# EAGLE board ChargeStepUpBoard (EAGLE 8.5.2)
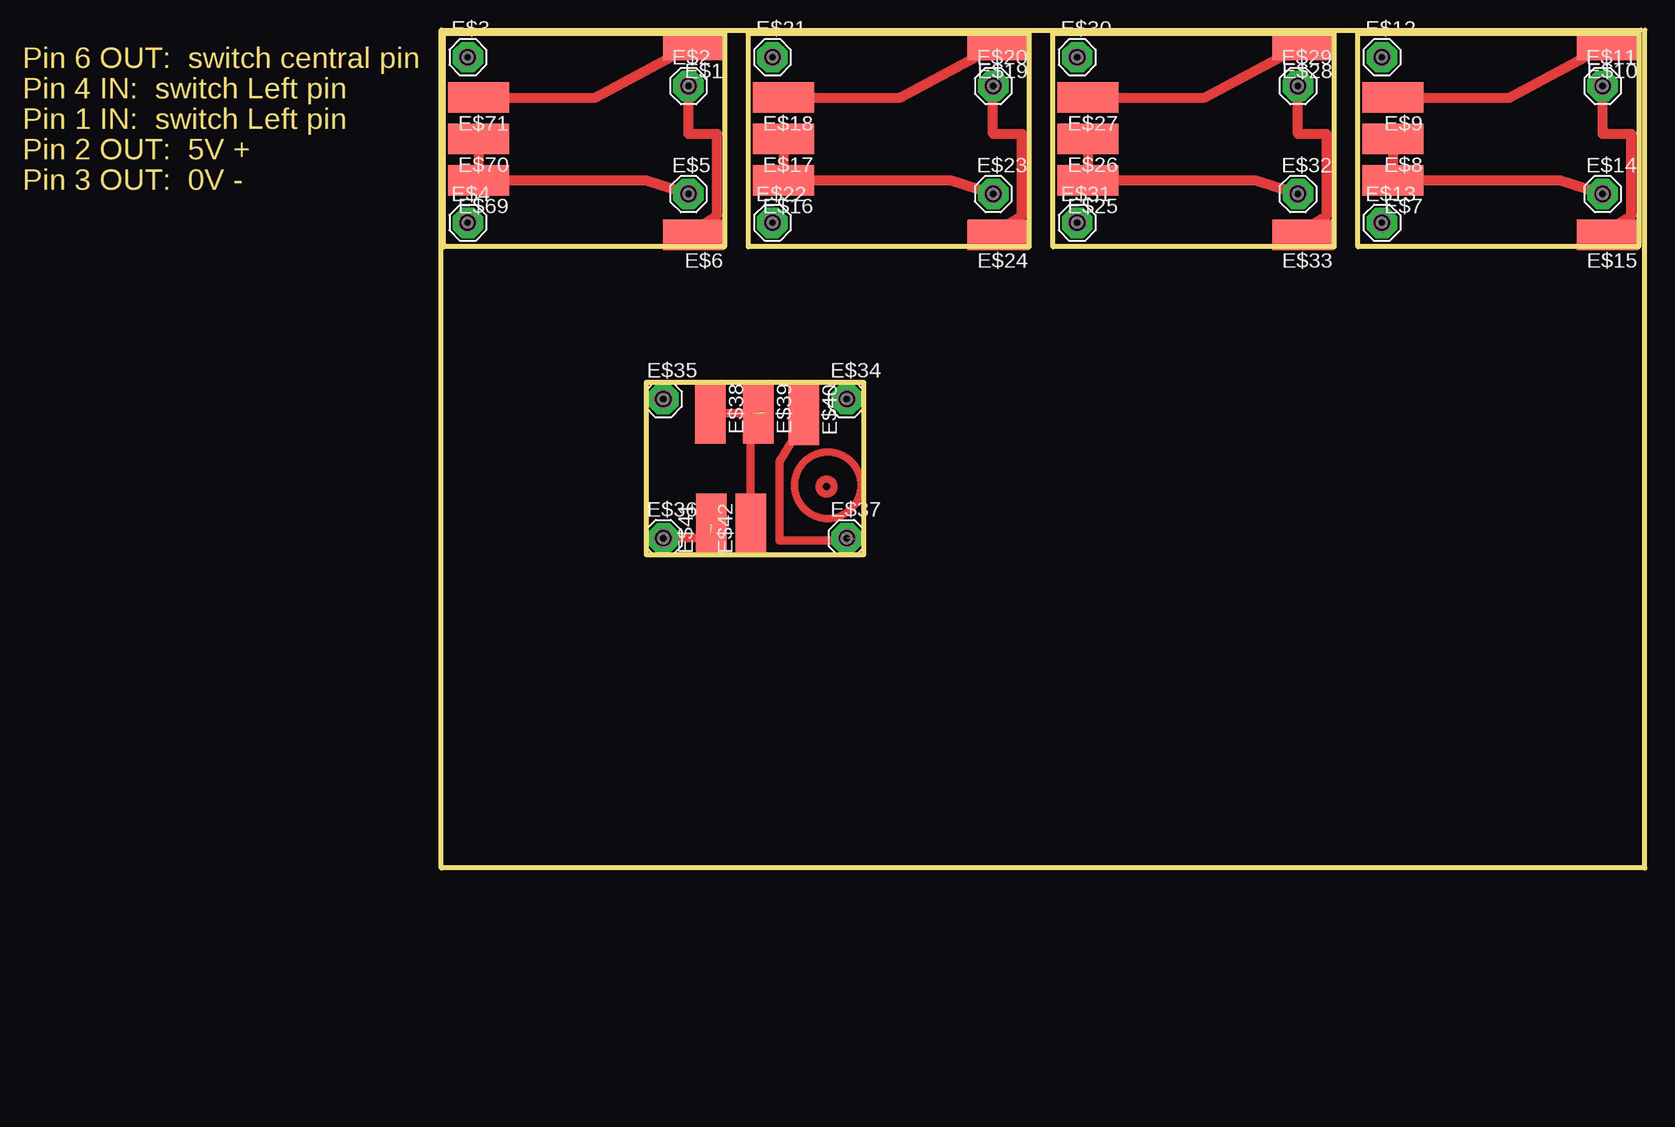
[diagram p0: board, top side]
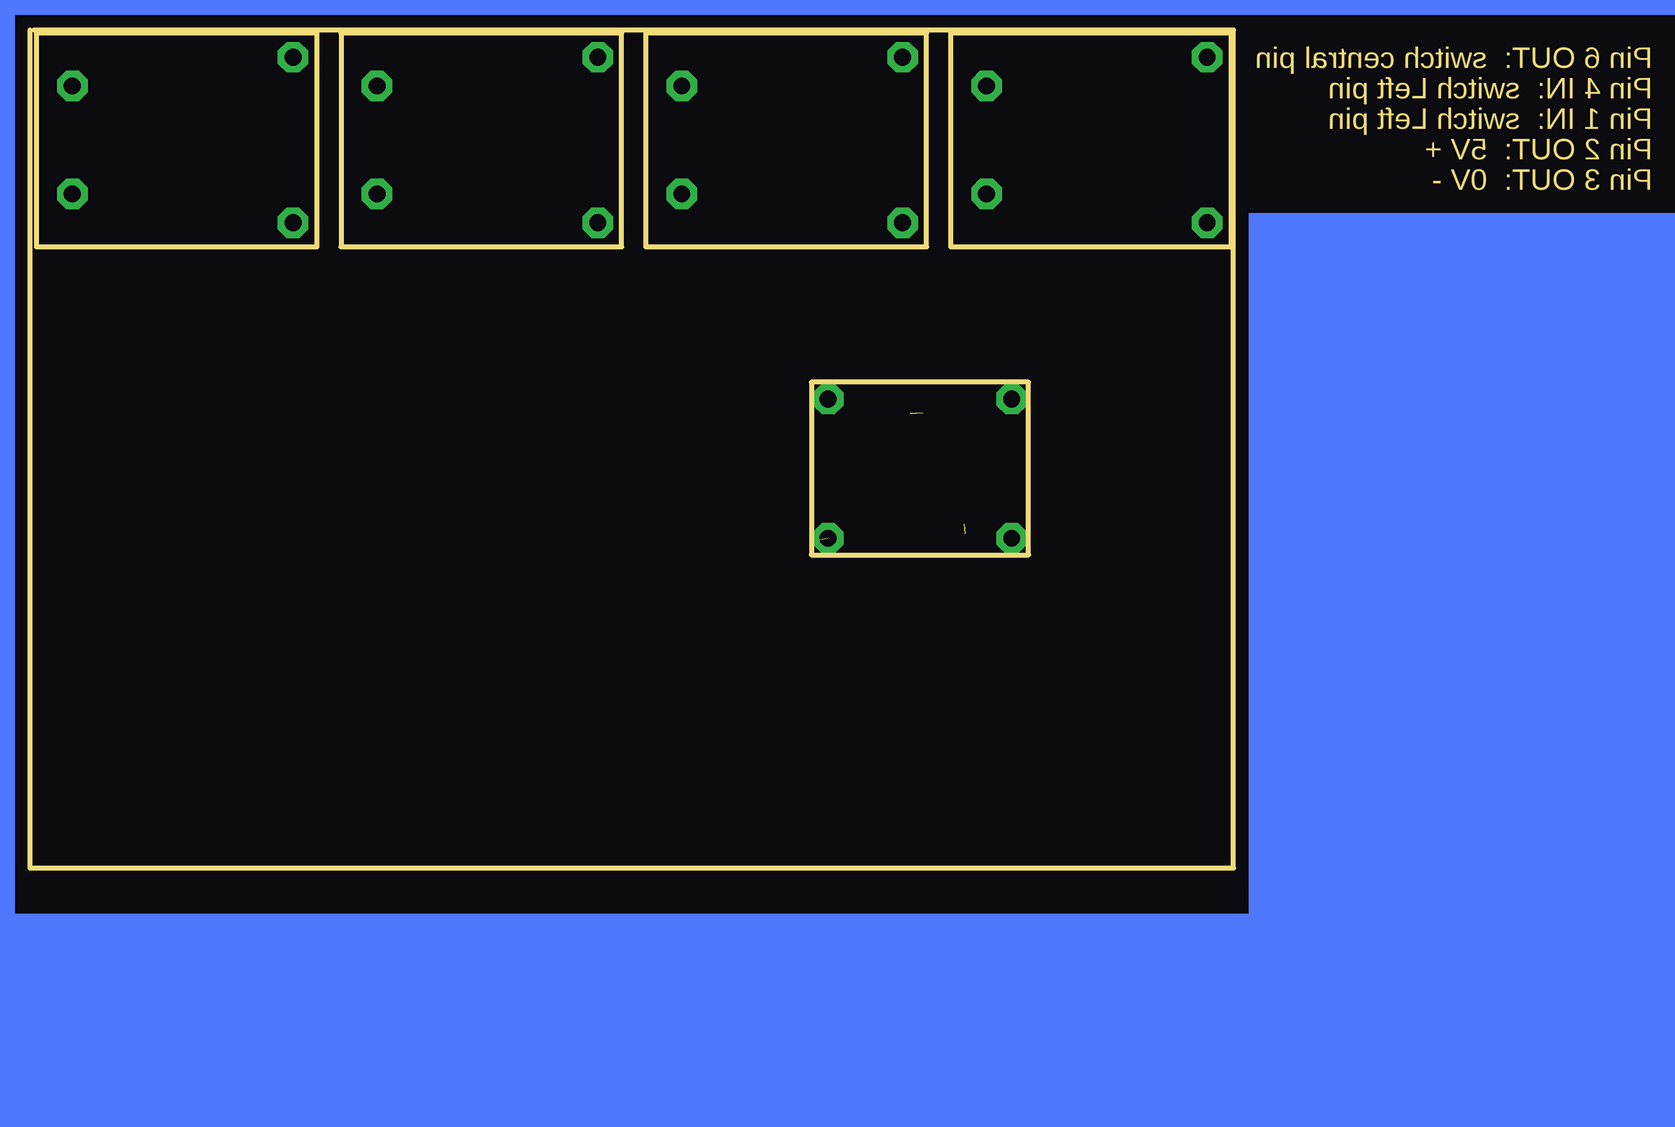
[diagram p1: board, bottom side, seen from below]

Size 100.33 x 69.85 mm. Coordinates in mm from the lower left corner, seen from the top.
Outline: 100,69.85 0,69.85 0,0 100.33,0 100.33,69.85
Outline: 23.6,51.8 0.2,51.8 0.2,69.6 23.6,69.6 23.6,51.8
Outline: 99.8,51.8 76.4,51.8 76.4,69.6 99.8,69.6 99.8,51.8
Outline: 49,51.8 25.6,51.8 25.6,69.6 49,69.6 49,51.8
Outline: 74.4,51.8 51,51.8 51,69.6 74.4,69.6 74.4,51.8
Outline: 17.1,40.5 35.2,40.5 35.2,26.1 17.1,26.1 17.1,40.5
Copper layers (1*16): Top 0.035mm / dielectric 1.5mm / Bottom 0.035mm
Design rules "default": minimum track width 6mil, minimum drill 0.35mm, track to track 6mil, track to pad 6mil, pad to pad 6mil, via to via 6mil, smd to smd 6mil, copper to edge 40mil, drill to drill 6mil, minimum pad ring 10mil, minimum via ring 8mil, stop-mask expansion 4mil, vias tented up to drill 0mil, thermal gap 10mil

## Footprints (pad centres in the part's own frame; a part is rotated, then mirrored left to right if it is on the bottom)
SMD2,54-5,08 = smd 2.54 x 5.08: 1 0,0
SE14 = drill 1.397 pad 2.54 octagon: MP 0,0

## Placement (x,y rotation side)
E$1  6  [SMD2,54-5,08]  21,68.6 90 top
E$2  [SE14]  20.6,65.2 0 top
E$3  [SE14]  2.2,67.6 0 top
E$4  [SE14]  2.2,53.8 0 top
E$5  [SE14]  20.6,56.2 0 top
E$6  6  [SMD2,54-5,08]  21,52.8 90 top
E$7  6  [SMD2,54-5,08]  79.31,57.34 90 top
E$8  [SMD2,54-5,08]  79.31,60.78 90 top
E$9  [SMD2,54-5,08]  79.31,64.23 90 top
E$10  6  [SMD2,54-5,08]  97.2,68.6 90 top
E$11  [SE14]  96.8,65.2 0 top
E$12  [SE14]  78.4,67.6 0 top
E$13  [SE14]  78.4,53.8 0 top
E$14  [SE14]  96.8,56.2 0 top
E$15  6  [SMD2,54-5,08]  97.2,52.8 90 top
E$16  6  [SMD2,54-5,08]  28.52,57.34 90 top
E$17  [SMD2,54-5,08]  28.52,60.78 90 top
E$18  [SMD2,54-5,08]  28.52,64.23 90 top
E$19  6  [SMD2,54-5,08]  46.4,68.6 90 top
E$20  [SE14]  46,65.2 0 top
E$21  [SE14]  27.6,67.6 0 top
E$22  [SE14]  27.6,53.8 0 top
E$23  [SE14]  46,56.2 0 top
E$24  6  [SMD2,54-5,08]  46.4,52.8 90 top
E$25  6  [SMD2,54-5,08]  53.91,57.34 90 top
E$26  [SMD2,54-5,08]  53.91,60.78 90 top
E$27  [SMD2,54-5,08]  53.91,64.23 90 top
E$28  6  [SMD2,54-5,08]  71.8,68.6 90 top
E$29  [SE14]  71.4,65.2 0 top
E$30  [SE14]  53,67.6 0 top
E$31  [SE14]  53,53.8 0 top
E$32  [SE14]  71.4,56.2 0 top
E$33  6  [SMD2,54-5,08]  71.8,52.8 90 top
E$34  [SE14]  33.8,39.1 0 top
E$35  [SE14]  18.5,39.1 0 top
E$36  [SE14]  18.5,27.5 0 top
E$37  [SE14]  33.8,27.5 0 top
E$38  [SMD2,54-5,08]  22.41,37.91 180 top
E$39  [SMD2,54-5,08]  26.41,37.91 180 top
E$40  [SMD2,54-5,08]  30.21,37.81 180 top
E$41  [SMD2,54-5,08]  22.48,28.68 0 top
E$42  [SMD2,54-5,08]  25.79,28.68 0 top
E$69  6  [SMD2,54-5,08]  3.12,57.34 90 top
E$70  [SMD2,54-5,08]  3.12,60.78 90 top
E$71  [SMD2,54-5,08]  3.12,64.23 90 top

## Library data of the parts
E$1 E$6-E$10 E$15-E$19 E$24-E$28 E$33 E$38-E$42 E$69-E$71 = wirepad
E$2-E$5 E$11-E$14 E$20-E$23 E$29-E$32 E$34-E$37 = solpad

## Nets
S$1: E$2.MP E$6.1
S$2: E$9.1 E$10.1
S$3: E$7.1 E$8.1 E$14.MP
S$4: E$11.MP E$15.1
S$5: E$18.1 E$19.1
S$6: E$16.1 E$17.1 E$23.MP
S$7: E$20.MP E$24.1
S$8: E$27.1 E$28.1
S$9: E$25.1 E$26.1 E$32.MP
S$10: E$29.MP E$33.1
S$11: E$36.MP E$41.1
S$12: E$38.1 E$39.1 E$42.1
S$13: E$37.MP E$40.1
S$31: E$1.1 E$71.1
S$32: E$5.MP E$69.1 E$70.1

## Tracks (layer width: path | path; a pad name or v marks a point on that pad's centre or on a via)
S$1
  Top 0.813: E$6.1 20.8,53 23,54.4 23,61.2 20.6,61.2 E$2.MP
S$2
  Top 0.813: E$9.1 89.03,64.23 E$10.1
S$3
  Top 0.813: E$8.1 E$7.1 | E$7.1 78.66,56.8 | E$7.1 93.26,57.34 arc-2 E$14.MP
S$4
  Top 0.813: E$15.1 97,53 99.2,54.4 99.2,61.2 96.8,61.2 E$11.MP
S$5
  Top 0.813: E$18.1 38.23,64.23 E$19.1
S$6
  Top 0.813: E$17.1 E$16.1 | E$16.1 27.86,56.8 | E$16.1 42.46,57.34 arc-2 E$23.MP
S$7
  Top 0.813: E$24.1 46.2,53 48.4,54.4 48.4,61.2 46,61.2 E$20.MP
S$8
  Top 0.813: E$27.1 63.62,64.23 E$28.1
S$9
  Top 0.813: E$26.1 E$25.1 | E$25.1 53.26,56.8 | E$25.1 67.86,57.34 arc-2 E$32.MP
S$10
  Top 0.813: E$33.1 71.6,53 73.8,54.4 73.8,61.2 71.4,61.2 E$29.MP
S$11  (1 unrouted)
  Top 0.152: 22,27.5 22.4,27.9
  Top 0.7: E$36.MP 22,27.5
S$12  (2 unrouted)
  Top 0.152: 25.79,37.78 25.9,37.9 25.6,38.2 25.5,38.2 | 26.98,37.91 27,37.9
  Top 0.7: E$42.1 25.79,37.78 | E$38.1 26.98,37.91
S$13  (1 unrouted)
  Top 0.152: E$40.1 29.1,35.4
  Top 0.7: 29.1,35.4 28.2,33.9 28.2,27.3 32.7,27.3 arc96 34.51,27.39
S$31
  Top 0.813: E$71.1 12.82,64.23 E$1.1
S$32
  Top 0.813: E$70.1 E$69.1 | E$69.1 2.46,56.8 | E$69.1 17.06,57.34 arc-2 E$5.MP
(copper drawn outside any net)
  shapes: Bottom area x8, Top circle x2

## Text on the board
Dimension: Pin 6 OUT: switch central pin | Pin 4 IN: switch Left pin | Pin 1 IN: switch Left pin | Pin 2 OUT: 5V + | Pin 3 OUT: 0V -
MyText: out - | in + | out - | in + | out - | in + | out - | in + | switch | switch | switch | switch | out + | out + | out + | out + | in - | in - | in - | in - | out - | out + | in - | in +